# Altium PCB mini四轴.PcbDoc
Units mm, origin at the board's own origin, x right, y up, seen from the top; angles counter-clockwise.
Board outline 94.98 x 94.98 mm, 2 copper layers (Top Layer, Bottom Layer); 50 components, 42 nets, 246 pads, 0 vias.
Unrouted connection lines stored in the file: 1.
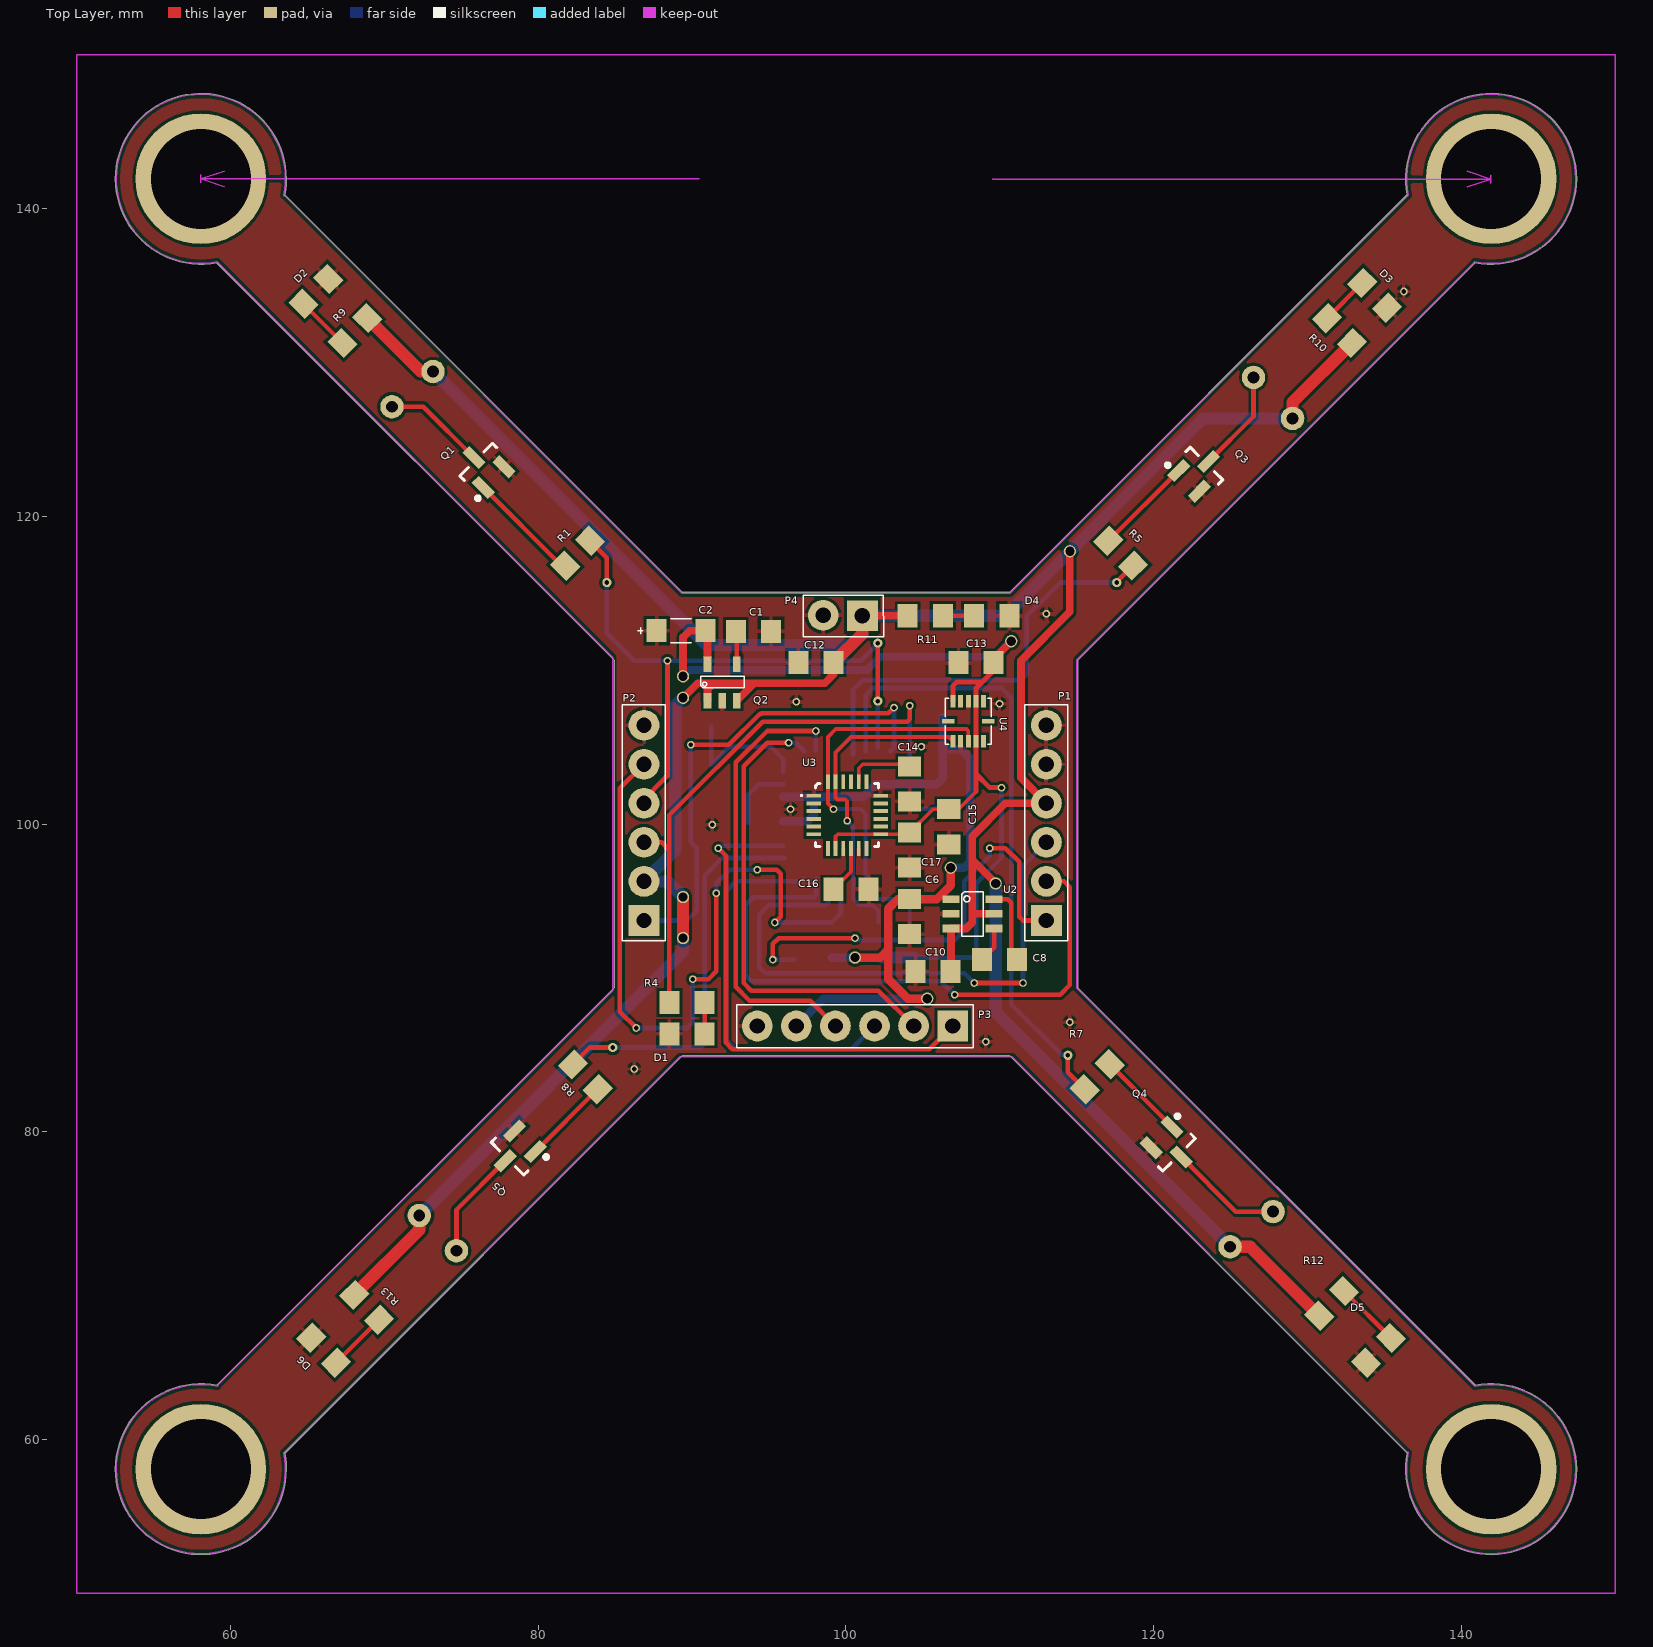
[diagram p0: Top Layer view]
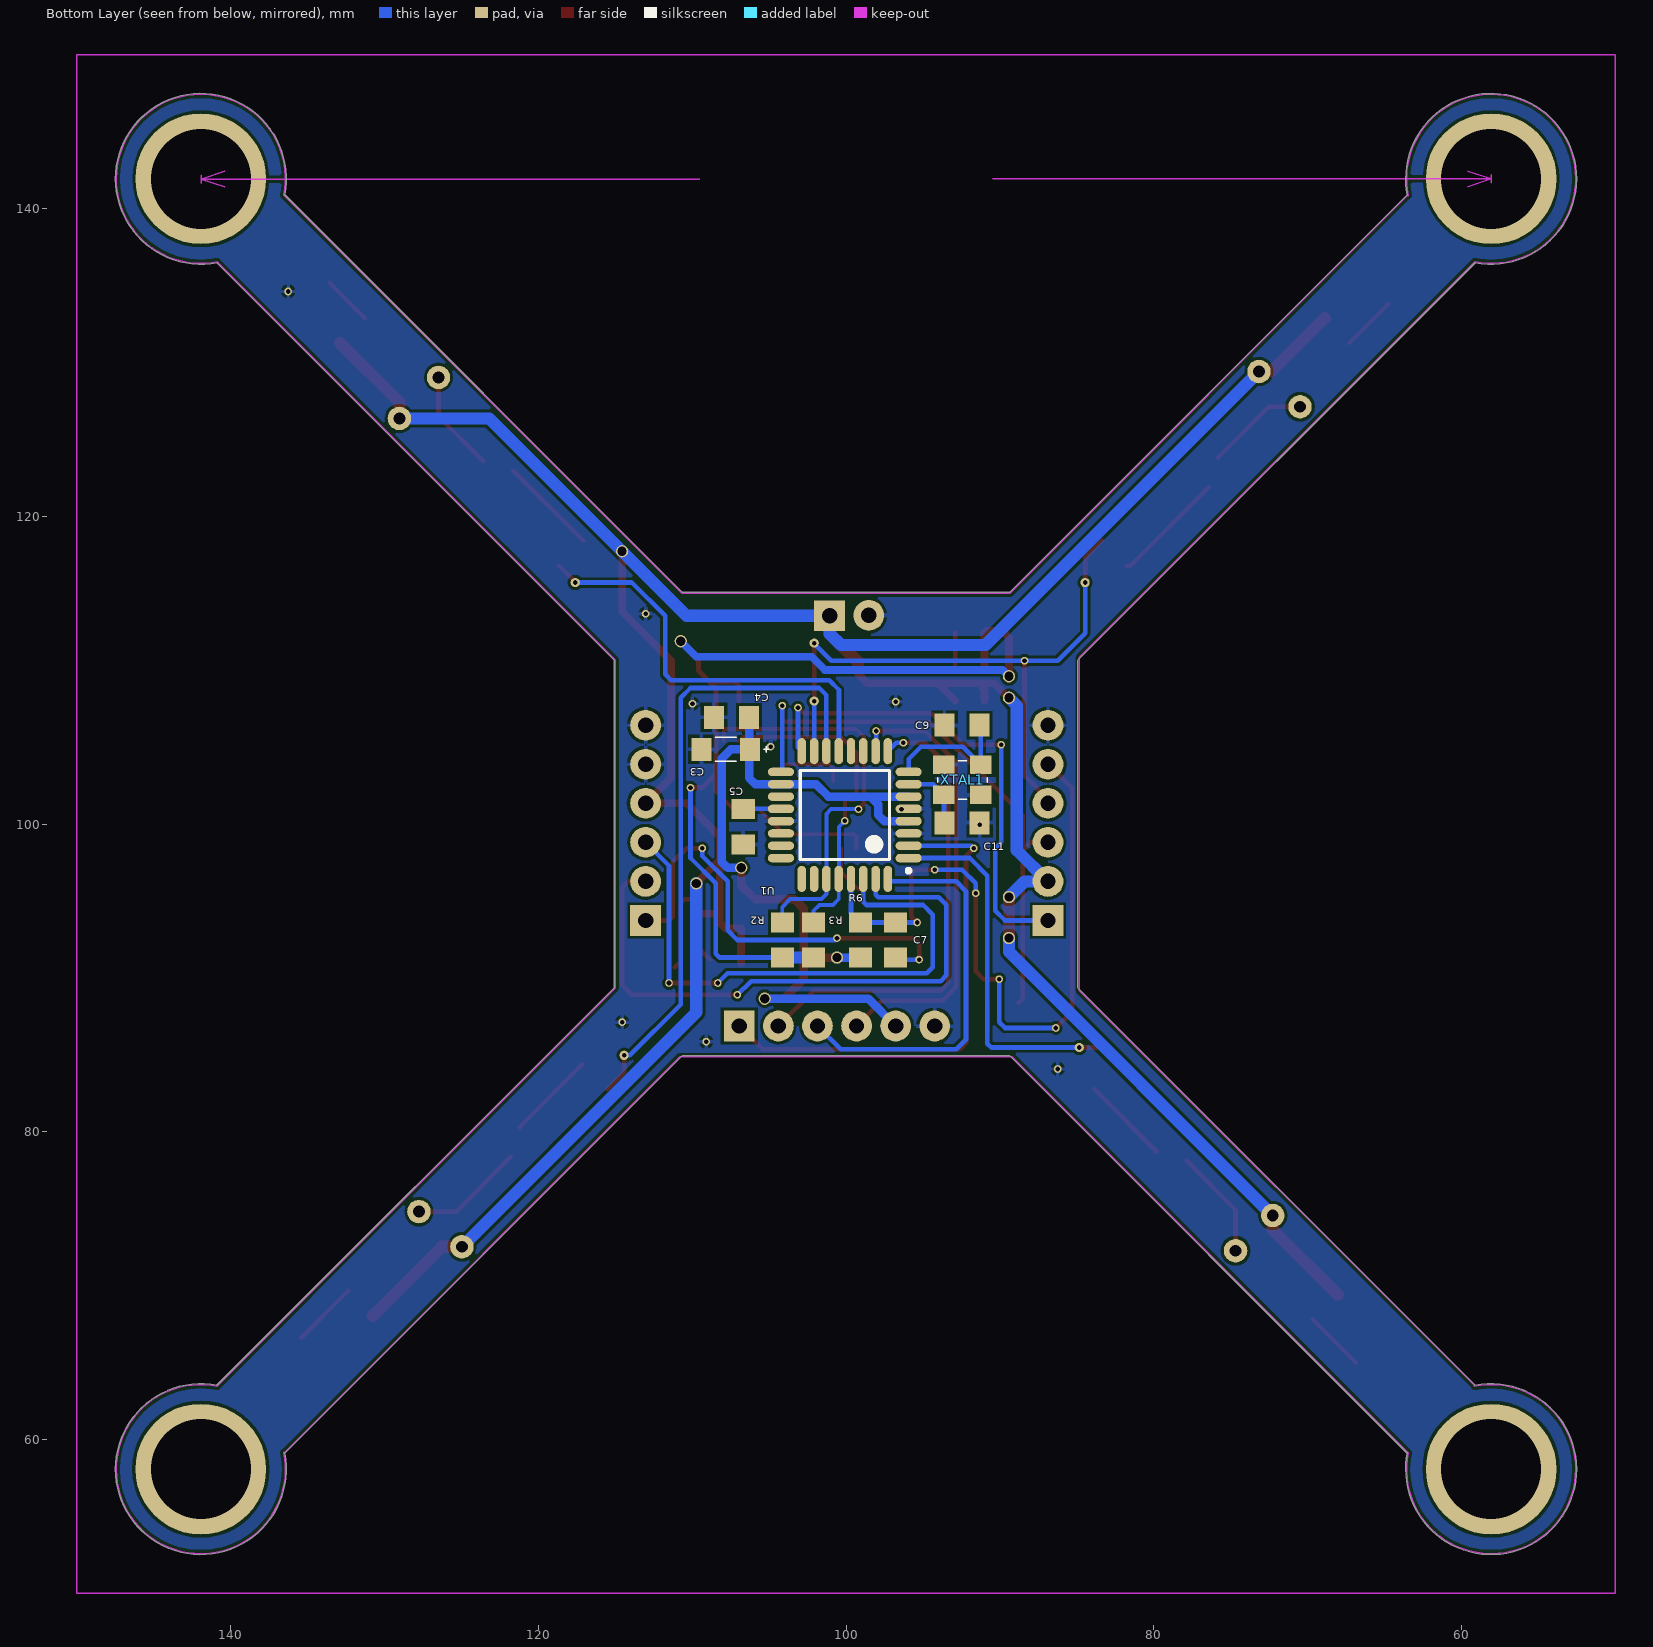
[diagram p1: Bottom Layer view, seen from below]

## Layer stack, top to bottom
Top Layer: signal copper 0.0356
Dielectric: dielectric 0.32, FR-4, Dk 4.8
Bottom Layer: signal copper 0.0356

## Board outline
63.609,58.058 ccw(c58.059,58.058) 63.511,59.096 89.365,84.95 110.634,84.95 136.473,59.11 ccw(c136.509,59.146) 136.488,59.1 ccw(c141.94,58.058) 147.49,58.058 ccw(c141.94,58.058) 140.902,63.51 115.05,89.362 115.05,110.637 140.887,136.474 ccw(c140.852,136.51) 140.898,136.49 ccw(c141.94,141.941) 147.49,141.941 ccw(c141.94,141.941) 136.487,140.903 110.635,115.05 89.364,115.05 63.526,140.889 ccw(c63.49,140.853) 63.51,140.899 ccw(c58.059,141.941) 63.609,141.941 ccw(c58.059,141.941) 59.097,136.489 84.95,110.636 84.95,89.363 59.111,63.525 ccw(c59.147,63.489) 59.101,63.51 ccw(c58.059,58.058)

## Design rules (kind name [scope] priority, off if disabled: settings)
Clearance [All] p1: gap=0.2
PolygonConnect [All] p1: connectstyle=Relief reliefconductorwidth=0.254 reliefentries=4 polygonreliefangle="90 Angle"
RoutingVias [All] p1: holewidth=0.711 width=1.27 viastyle="Through Hole" minholewidth=0.711 minwidth=1.27 maxholewidth=0.711 maxwidth=1.27
SilkscreenOverComponentPads [All] p1: minsilkscreentomaskgap=0.254
SolderMaskExpansion [All] p1: expansion=0.102
Width Width_1 [(InNet('3V3') OR InNet('5V') OR InNet('VCC'))] p1: maxlimit=0.8 minlimit=0.25 preferedwidth=0.6 minimp=50.000000 maximp=50.000000 favimp=50.000000
Width [All] p2: maxlimit=0.3 minlimit=0.25 preferedwidth=0.3 minimp=50.000000 maximp=50.000000 favimp=50.000000
27 further rules are at their usual default settings.

## Components (designator, comment, footprint, x,y, rotation, side; value= is the part's Value field where it differs from the comment)
C1 "470PF" 0805_顶层 93.98,112.522 r0 top
C2 "2.2UF" A型电容 88.9,112.522 r0 top
C3 "4.7UF" A型电容 107.442,104.902 r0 bottom
C4 "0.1UF" 0805_顶层 107.442,106.934 r0 bottom
C5 "0.1UF" 0805_顶层 106.68,99.822 r270 bottom
C6 "1UF" 0805_顶层 104.14,93.98 r270 top
C7 "0.1UF" 0805_顶层 96.774,92.456 r90 bottom
C8 "1UF" 0805_顶层 109.982,91.186 r0 top
C9 "15PF" 0805_顶层 92.456,106.426 r0 bottom
C10 "1UF" 0805_顶层 105.664,90.424 r0 top
C11 "15PF" 0805_顶层 92.456,100.076 r180 bottom
C12 "0.1UF" 0805_顶层 98.044,110.49 r0 top
C13 "22NF" 0805_顶层 108.458,110.49 r180 top
C14 "2.2NF" 0805_顶层 104.14,102.616 r270 top
C15 "0.1UF" 0805_顶层 106.68,99.822 r270 top
C16 "0.1UF" 0805_顶层 100.33,95.758 r180 top
C17 "0.1UF" 0805_顶层 104.14,98.298 r90 top
D1 "LED" 0805_顶层 89.662,86.36 r180 top
D2 "LED" 0805_顶层 65.532,134.62 r45 top
D3 "LED" 0805_顶层 134.366,134.366 r315 top
D4 "LED" 0805_顶层 109.474,113.538 r0 top
D5 "LED" 0805_顶层 134.62,65.786 r225 top
D6 "LED" 0805_顶层 66.04,65.786 r135 top
P1 "FDTI" 排针_6_2.54 113.03,93.726 r90 top
P2 "ISP" 排针_6_2.54 86.868,93.726 r90 top
P3 "RECEIVER" 排针_6_2.54 106.934,86.868 r180 top
P4 "排针_2" 排针_2 101.092,113.538 r180 top
Q1 "IRLML2502" IRLML2502_顶层 76.454,123.19 r45 top
Q2 "MIC5219_顶层" MIC5219_顶层 91.948,109.22 r180 top
Q3 "IRLML2502" IRLML2502_顶层 122.936,122.936 r315 top
Q4 "IRLML2502" IRLML2502_顶层 121.158,78.994 r225 top
Q5 "IRLML2502" IRLML2502_顶层 78.486,78.74 r135 top
R1 "20K" 0805_顶层 82.55,117.602 r225 top
R2 "2K" 0805_顶层 104.14,92.456 r90 bottom
R3 "2K" 0805_顶层 102.108,92.456 r90 bottom
R4 "680" 0805_顶层 89.662,88.392 r0 top
R5 "20K" 0805_顶层 117.856,117.602 r135 top
R6 "1K" 0805_顶层 99.06,92.456 r270 bottom
R7 "20K" 0805_顶层 116.332,83.566 r45 top
R8 "20K" 0805_顶层 83.058,83.566 r315 top
R9 "680" 0805_顶层 68.072,132.08 r45 top
R10 "680" 0805_顶层 132.08,132.08 r315 top
R11 "680" 0805_顶层 105.156,113.538 r180 top
R12 "680" 0805_顶层 131.572,68.834 r225 top
R13 "680" 0805_顶层 68.834,68.58 r135 top
U1 "Atmega32_顶层" Atmega32_顶层 100.076,100.584 r0 bottom
U2 "LTC3200_顶层" LTC3200_顶层 108.204,94.234 r0 top
U3 "ITG3205_顶层" ITG3205_顶层 100.076,100.584 r0 top
U4 "BMA020_顶层" BMA020_顶层 107.95,106.68 r180 top
XTAL1 "晶振" 晶振_3225_顶层 92.456,102.87 r180 bottom

## Footprints (in the part's own frame and the unit in brackets; to place one, negate y for a bottom-side part, rotate by r counter-clockwise, add the part's x,y. Pads: shape width x height; smd on the part's side, far side on the other; paste and mask are expansions set on the pad)
0805_顶层 [mm]
  rect 1.3x1.5 smd: 1(-1.138,0) 2(1.143,0)
Atmega32_顶层 [mm]
  oval 1.7x0.55 smd: 1(-4.15,2.8) 2(-4.15,2) 3(-4.15,1.2) 4(-4.15,0.4) 5(-4.15,-0.4) 6(-4.15,-1.2) 7(-4.15,-2) 8(-4.15,-2.8) 17(4.15,-2.8) 18(4.15,-2) 19(4.15,-1.2) 20(4.15,-0.4) 21(4.15,0.4) 22(4.15,1.2) 23(4.15,2) 24(4.15,2.8)
  oval 0.55x1.7 smd: 9(-2.8,-4.15) 10(-2,-4.15) 11(-1.2,-4.15) 12(-0.4,-4.15) 13(0.4,-4.15) 14(1.2,-4.15) 15(2,-4.15) 16(2.8,-4.15) 25(2.8,4.15) 26(2,4.15) 27(1.2,4.15) 28(0.4,4.15) 29(-0.4,4.15) 30(-1.2,4.15) 31(-2,4.15) 32(-2.8,4.15)
  silkscreen extent -4.27,-2.9 2.9,3.75, body extent -3.5,-3.5 3.5,3.5, height 1.2
A型电容 [mm]
  rect 1.3x1.5 smd: 1(-1.213,0.05) 2(1.968,0.05)
  silkscreen extent -2.42,-0.73 1.05,0.82
BMA020_顶层 [mm]
  rect 0.32x0.8 smd mask+0.04: 1(-1,-1.3) 2(-0.5,-1.3) 3(0,-1.3) 4(0.5,-1.3) 5(1,-1.3) 6(1,1.3) 7(0.5,1.3) 8(0,1.3) 9(-0.5,1.3) 10(-1,1.3)
  rect 0.8x0.32 smd paste+0 mask+0.04: 11(-1.3,0)
  rect 0.8x0.32 smd mask+0.04: 12(1.3,0)
  silkscreen extent -1.5,-1.5 1.5,1.5
IRLML2502_顶层 [mm]
  rect 0.65x1.5 smd: 1(-0.95,-0.9) 2(0.95,-0.9) 3(0,0.9)
  silkscreen extent -1.82,-1.27 1.5,0.7, body extent -1.53,-0.7 1.52,0.7, height 1.1
ITG3205_顶层 [mm]
  rect 0.95x0.25 smd: 1(-2.175,1.25) 2(-2.175,0.75) 3(-2.175,0.25) 4(-2.175,-0.25) 5(-2.175,-0.75) 6(-2.175,-1.25) 13(2.175,-1.25) 14(2.175,-0.75) 15(2.175,-0.25) 16(2.175,0.25) 17(2.175,0.75) 18(2.175,1.25)
  rect 0.25x0.95 smd: 7(-1.25,-2.175) 8(-0.75,-2.175) 9(-0.25,-2.175) 10(0.25,-2.175) 11(0.75,-2.175) 12(1.25,-2.175) 19(1.25,2.175) 20(0.75,2.175) 21(0.25,2.175) 22(-0.25,2.175) 23(-0.75,2.175) 24(-1.25,2.175)
  silkscreen extent -3.02,-2.05 2.05,2.05, body extent -2,-2 2,2, height 0.85
LTC3200_顶层 [mm]
  rect 1.1x0.5 smd: 1(-1.375,0.875) 2(-1.375,-0.075) 3(-1.375,-1.025) 4(1.425,-1.025) 5(1.425,-0.075) 6(1.425,0.875)
  silkscreen extent -0.67,-1.53 0.73,1.38
MIC5219_顶层 [mm]
  rect 0.5x1 smd: 1(0.95,1.2) 2(0,1.2) 3(-0.95,1.2) 4(-0.95,-1.175) 5(0.95,-1.175)
  silkscreen extent -1.42,-0.38 1.4,0.38
排针_2 [mm]
  rect 2x2 hole 1: 1(0.025,0)
  round 2 hole 1: 2(2.575,-0.025)
  silkscreen extent -1.37,-1.33 3.87,1.35
排针_6_2.54 [mm]
  rect 2x2 hole 1: 1(0,0)
  round 2 hole 1: 2(2.54,0) 3(5.08,0) 4(7.62,0) 5(10.16,0) 6(12.7,0)
  silkscreen extent -1.33,-1.38 14.03,1.4
晶振_3225_顶层 [mm]
  rect 1.4x1.2 smd: 1(-1.175,-0.975) 2(1.225,-0.975) 3(1.225,0.975) 4(-1.175,0.975)
  silkscreen extent -1.58,-1.25 1.62,1.25

## Part data
C1 C4 C5 C6 C7 C8 C9 C10 C11 C12 C13 C14 C15 C16 C17: library part 电容_无极性_0805_顶层, "电容"
C2 C3: library part 电容_A型, "电容_A型"
D1 D2 D3 D4 D5 D6: library part LED_0805_顶层
P1 P2 P3: library part 排针_6_2.54, "排针_6_2.54"
Q1 Q3 Q4 Q5: library part IRLML2502_顶层
Q2: "MIC5219"
R1 R2 R3 R4 R5 R6 R7 R8 R9 R10 R11 R12 R13: library part 电阻_0805_顶层, "电阻"
U1: "Atmega32"
U2: "LTC3200"
U3: "ITG3205"
U4: "BMA020"
XTAL1: library part 晶振_3225_顶层

## Free pads (board coordinates)
  round 1.524 hole 0.762: 0(73.152,129.413) 0(74.676,72.263) 0(124.968,72.517) 0(126.492,129.032) 1(70.485,127.127) 1(72.263,74.549) 1(127.762,74.803) 1(129.032,126.365)
  round 0.6 hole 0.3: 0(84.455,115.697) 0(84.836,85.471) 0(102.066,107.992) 0(102.066,111.76) 0(114.427,84.963) 0(117.602,115.697)
  round 0.5 hole 0.3: 0(86.233,84.074) 0(86.36,86.741) 0(88.392,110.617) 0(89.916,105.156) 0(90.043,89.916) 0(91.313,99.949) 0(91.567,95.504) 0(91.694,98.425) 0(94.234,97.028) 0(95.25,91.186) 0(95.377,93.599) 0(96.266,105.283) 0(96.393,100.965) 0(96.774,107.95) 0(98.044,106.045) 0(99.187,100.965) 0(100.076,100.203) 0(100.584,92.583) 0(103.124,107.569) 0(104.14,107.696) 0(104.902,105.029) 0(107.061,88.9) 0(108.331,89.662) 0(109.093,85.852) 0(109.347,98.425) 0(109.982,107.823) 0(110.109,102.362) 0(111.506,89.662) 0(113.03,113.665) 0(114.554,87.122) 0(136.271,134.62)
  round 0.8 hole 0.6: 8(89.408,92.583) 8(89.408,95.25) 8(89.408,108.204) 8(89.408,109.601) 8(100.584,91.313) 8(105.283,88.646) 8(106.807,97.155) 8(109.728,96.139) 8(110.744,111.887) 8(114.554,117.729)
  round 8.5 hole 6.5: 9(58.059,141.941) 10(58.059,58.058) 11(141.942,58.058) 12(141.943,141.943)

## Nets (pads, with @x,y where several pads share a name; then routed paths per layer and width w, separated by ;. In a path a pad name is that pad's centre, name@x,y a point inside that pad or via, vN(x,y) a via of type N, cw(c..) or ccw(c..) an arc to the next point about the centre after c; other vN are vias at no path point)
3V3: C2.2 C13.1 C15.1 C17.2 pad.0@110.109,102.362 pad.8@89.408,109.601 pad.8@110.744,111.887 Q2.5 R2.1 R3.1 U3.8 U3.13 U4.2 U4.5 U4.9 | length 73.4
  Top Layer w0.25: U3.8 99.326,99.199 99.461,99.334 U3.13 104.033,99.334 C17.2 105.659,100.96 C15.1 107.31,100.96 108.45,102.1
  Top Layer w0.32: U4.5 106.95,108.982 107.188,109.22 108.839,109.22 ; 108.45,102.1 108.45,103.251 ; C13.1 109.596,109.977 108.839,109.22 ; pad.0@110.109,102.362 109.339,102.362 108.45,103.251 ; 108.45,103.251 U4.9 U4.2 108.45,108.831 108.839,109.22
  Top Layer w0.5: pad.8@89.408,109.601 89.408,112.141 89.839,112.572 C2.2 90.998,112.442 Q2.5 ; C13.1@109.596,110.739 pad.8@110.744,111.887
  Bottom Layer w0.3: R2.1 108.209,91.318 108.463,91.572 108.463,96.144 110.109,97.79 pad.0@110.109,102.362
  Bottom Layer w0.5: pad.8@89.535,109.728 89.408,109.601 89.824,110.017 101.381,110.017 102.235,110.871 109.728,110.871 pad.8@110.744,111.887
  Bottom Layer w0.8: R3.1@102.362,91.318 R2.1 R2.1@104.394,91.318
5V: C3.1 C4.1 C6.1 P3.5 pad.8@100.584,91.313 pad.8@105.283,88.646 pad.8@106.807,97.155 R6.2 U1.4 U1.6 U1.18 U2.1 | length 55.2
  Top Layer w0.55: pad.8@100.584,91.313 102.235,91.313 102.743,91.821 ; pad.8@105.283,88.646 104.013,88.646 102.743,89.916 102.743,91.821 ; pad.8@106.807,97.155 106.807,96.012 105.913,95.118 104.394,95.118 103.373,95.118 102.743,94.488 102.743,91.821
  Bottom Layer w0.55: U1.4 97.517,100.184 97.917,100.584 97.917,101.276 98.425,101.784 ; U1.6 98.425,101.784 ; P3.5 98.552,88.646 pad.8@105.283,88.646 ; R6.2 pad.8@100.584,91.313 ; C3.1 C3.1@106.304,104.852 ; C4.1 C3.1@106.304,104.852 ; pad.8@106.807,97.155 107.696,97.155 108.077,97.536 108.077,104.267 107.492,104.852 C3.1@106.304,104.852 ; 98.425,101.784 101.149,101.784 101.949,102.584 U1.18 105.886,102.584 106.304,103.002 C3.1@106.304,104.852
D2: P3.3 U1.32 | length 25.6
  Bottom Layer w0.3: U1.32 97.108,96.266 92.837,96.266 92.202,95.631 92.202,85.979 92.837,85.344 100.33,85.344 P3.3
D3: pad.0@84.836,85.471 R8.1 U1.1 | length 25.7
  Top Layer w0.3: R8.1 83.354,85.471 pad.0@84.836,85.471
  Bottom Layer w0.3: pad.0@84.836,85.471 90.551,85.471 90.805,85.725 90.805,96.647 91.948,97.79 U1.1@96.012,97.79
D4: P3.1 pad.0@91.694,98.425 U1.2 | length 32.6
  Top Layer w0.3: pad.0@91.694,98.425 92.202,97.917 92.202,85.781 92.583,85.4 ; 92.639,85.344 105.41,85.344 P3.1
  Bottom Layer w0.3: pad.0@91.694,98.425 91.853,98.584 U1.2
D5: P3.2 pad.0@96.266,105.283 U1.9 | length 31.1
  Top Layer w0.3: pad.0@96.266,105.283 94.869,105.283 93.345,103.759 93.345,89.662 93.853,89.154 102.108,89.154 P3.2
  Bottom Layer w0.3: pad.0@96.266,105.283 96.727,105.283 U1.9
D6: P3.4 pad.0@98.044,106.045 U1.10 | length 29.5
  Top Layer w0.3: pad.0@98.044,106.045 94.869,106.045 92.837,104.013 92.837,89.408 93.726,88.519 97.663,88.519 P3.4
  Bottom Layer w0.3: U1.10@98.044,104.766 pad.0@98.044,106.045
D9: pad.0@117.602,115.697 R5.1 U1.13 | length 28
  Top Layer w0.3: pad.0@117.602,115.697 117.602,115.739 R5.1
  Bottom Layer w0.3: U1.13@100.457,104.521 100.457,108.712 101.092,109.347 111.379,109.347 111.76,109.728 111.76,113.538 113.919,115.697 pad.0@117.602,115.697
D10: pad.0@114.427,84.963 R7.1 U1.14 | length 41.2
  Top Layer w0.3: pad.0@114.427,84.963 114.427,83.862 R7.1
  Bottom Layer w0.3: U1.14 101.276,108.388 101.727,108.839 110.109,108.839 110.744,108.204 110.744,88.265 114.046,84.963 pad.0@114.427,84.963
D11: P2.4 pad.0@84.455,115.697 pad.0@88.392,110.617 pad.0@102.066,107.992 pad.0@102.066,111.76 R1.1 U1.15 | length 42.1
  Top Layer w0.3: R1.1 84.455,117.306 pad.0@84.455,115.697 ; P2.4@86.614,101.346 88.392,103.124 88.392,110.363 pad.0@88.392,110.617 ; pad.0@102.066,107.992 pad.0@102.066,111.76
  Bottom Layer w0.3: pad.0@84.455,115.697 84.455,112.395 86.233,110.617 100.965,110.617 pad.0@102.087,111.739 ; U1.15@102.066,104.944 pad.0@102.066,107.992
D12: P2.1 pad.0@89.916,105.156 pad.0@103.124,107.569 U1.16 | length 32.3
  Top Layer w0.3: pad.0@89.916,105.156 92.384,105.156 94.375,107.147 94.447,107.147 94.488,107.188 102.743,107.188 pad.0@103.124,107.569
  Bottom Layer w0.3: P2.1 89.662,93.726 90.297,94.361 90.297,98.425 89.916,98.806 89.916,102.108 ; 89.916,102.616 89.916,102.108 ; pad.0@89.916,105.156 89.916,102.108 ; U1.16 103.124,104.982 pad.0@103.124,107.569
D13: P2.3 pad.0@104.14,107.696 R4.1 U1.17 | length 37.7
  Top Layer w0.3: P2.3@86.614,98.806 P2.3 88.011,98.806 88.519,98.298 ; R4.1@88.778,88.392 88.519,88.651 88.519,98.298 ; pad.0@104.14,107.696 104.14,106.807 103.98,106.647 94.582,106.647 88.519,100.584 88.519,98.298
  Bottom Layer w0.3: U1.17@104.14,103.47 pad.0@104.14,107.696
DTR: C7.1 P1.1 pad.0@95.25,91.186 pad.0@100.584,92.583 pad.0@109.347,98.425 | length 29.1
  Top Layer w0.3: pad.0@95.25,91.186 95.25,92.202 95.631,92.583 pad.0@100.584,92.583 ; pad.0@109.347,98.425 110.363,98.425 111.252,97.536 111.252,93.98 111.506,93.726 P1.1
  Bottom Layer w0.3: pad.0@95.25,91.186 C7.1@96.642,91.186 ; pad.0@100.584,92.583 100.711,92.456 107.061,92.456 107.696,93.091 107.696,96.266 109.347,97.917 pad.0@109.347,98.425
GND: C1.2 C2.1 C3.2 C4.2 C5.2 C6.2 C9.2 C10.1 C11.2 C12.1 C13.2 C14.2 C15.2 C16.1 C17.1 D1.2 D2.2 D3.2 D4.2 D5.2 D6.2 P1.5 P1.6 P2.6 P3.6 P4.2 pad.0@86.233,84.074 pad.0@91.313,99.949 pad.0@96.393,100.965 pad.0@96.774,107.95 pad.0@104.902,105.029 pad.0@109.093,85.852 pad.0@109.982,107.823 pad.0@113.03,113.665 pad.0@114.554,87.122 pad.0@136.271,134.62 Q1.2 Q2.2 Q3.2 Q4.2 Q5.2 U1.3 U1.5 U1.21 U2.2 U3.1 U3.9 U3.11 U3.18 U4.3 U4.7 XTAL1.2 XTAL1.4
M1-: pad.0@74.676,72.263 Q5.3 | length 7.2
  Top Layer w0.3: pad.0@74.676,72.263 74.676,74.93 Q5.3
M2-: pad.1@127.762,74.803 Q4.3 | length 7.4
  Top Layer w0.3: Q4.3 125.349,74.803 pad.1@127.762,74.803
M3-: pad.0@126.492,129.032 Q3.3 | length 6.7
  Top Layer w0.3: Q3.3 126.492,126.492 pad.0@126.492,129.032
M4-: pad.1@70.485,127.127 Q1.3 | length 6.7
  Top Layer w0.3: pad.1@70.485,127.127 72.517,127.127 Q1.3
NetC1_1: C1.1 Q2.4 | length 2.1
  Top Layer w0.3: Q2.4 C1.1@92.898,112.466
NetC5_1: C5.1 U1.20 | length 2.4
  Bottom Layer w0.3: U1.20 C5.1@106.656,100.984
NetC8_1: C8.1 U2.4 | length 2.3
  Top Layer w0.3: C8.1 109.629,91.971 U2.4
NetC8_2: C8.2 U2.6 | length 5.6
  Top Layer w0.3: U2.6 110.504,95.109 110.744,94.869 110.744,91.059 C8.2@111.125,90.678
NetC9_1: C9.1 U1.8 XTAL1.3 | length 9
  Bottom Layer w0.3: C9.1@91.231,106.339 XTAL1.3 ; XTAL1.3@91.318,103.932 XTAL1.3 ; U1.8 95.926,104.226 95.123,105.029 92.415,105.029 XTAL1.3
NetC11_1: C11.1 U1.7 XTAL1.1 | length 4.4
  Bottom Layer w0.3: C11.1 93.631,100.113 XTAL1.1 94.32,102.584 U1.7
NetC14_1: C14.1 U3.20 | length 4.3
  Top Layer w0.25: U3.20 100.826,103.62 101.092,103.886 104.008,103.886 C14.1
NetC16_2: C16.2 U3.10 | length 3.1
  Top Layer w0.25: C16.2 100.326,96.897 U3.10
NetD1_1: D1.1 R4.2 | length 2
  Top Layer w0.3: D1.1@90.805,86.365 R4.2
NetD2_1: D2.1 R9.1 | length 3.6
  Top Layer w0.254: D2.1 R9.1
NetD3_1: D3.1 R10.1 | length 3.2
  Top Layer w0.3: R10.1 D3.1
NetD4_1: D4.1 R11.1 | length 2
  Top Layer w0.3: R11.1 D4.1
NetD5_1: D5.1 R12.1 | length 4.3
  Top Layer w0.3: R12.1 D5.1
NetD6_1: D6.1 R13.1 | length 4
  Top Layer w0.3: D6.1 R13.1
NetQ1_1: Q1.1 R1.2 | length 7.4
  Top Layer w0.3: Q1.1 81.507,116.794 R1.2
NetQ3_1: Q3.1 R5.2 | length 6.5
  Top Layer w0.3: R5.2@117.067,118.41 Q3.1
NetQ4_1: Q4.1 R7.2 | length 5.8
  Top Layer w0.3: R7.2 121.193,80.321 Q4.1
NetQ5_1: Q5.1 R8.2 | length 5.7
  Top Layer w0.3: Q5.1 R8.2@83.847,82.758
RESET: C7.2 P2.5 pad.0@86.36,86.741 pad.0@90.043,89.916 pad.0@91.567,95.504 pad.0@94.234,97.028 pad.0@95.377,93.599 R6.1 U1.29 | length 47.1
  Top Layer w0.3: pad.0@86.36,86.741 85.3,87.801 85.3,102.318 P2.5 ; pad.0@90.043,89.916 91.059,89.916 91.567,90.424 pad.0@91.567,95.504 ; pad.0@94.234,97.028 95.504,97.028 95.758,96.774 95.758,93.98 pad.0@95.377,93.599
  Bottom Layer w0.3: pad.0@86.36,86.741 89.662,86.741 90.043,87.122 pad.0@90.043,89.916 ; pad.0@91.567,95.504 91.567,96.139 92.456,97.028 pad.0@94.234,97.028 ; pad.0@95.377,93.599 C7.2 R6.1@99.055,93.599 ; R6.1 99.676,94.21 U1.29
RX: P1.3 pad.0@108.331,89.662 pad.0@111.506,89.662 U1.30 | length 37.1
  Top Layer w0.3: pad.0@108.331,89.662 pad.0@111.506,89.662
  Bottom Layer w0.3: U1.30 98.876,94.939 98.671,94.734 94.988,94.734 94.361,94.107 94.361,90.678 94.75,90.289 107.704,90.289 pad.0@108.331,89.662 ; pad.0@111.506,89.662 111.506,97.282 P1.3
SCL: pad.0@100.076,100.203 R3.2 U1.28 U3.23 U4.6 | length 21.2
  Top Layer w0.25: pad.0@100.076,100.203 100.076,101.473 99.949,101.6 99.441,101.6 99.326,101.715 U3.23 99.326,104.66 100.33,105.664 106.666,105.664 U4.6
  Bottom Layer w0.25: pad.0@100.076,100.203 100.457,99.822 U1.28@100.457,96.393 ; U1.28 100.476,95.104 100.838,94.742 101.727,94.742 102.108,94.361 R3.2
SDA: pad.0@99.187,100.965 R2.2 U1.27 U3.24 U4.8 | length 26.6
  Top Layer w0.25: pad.0@99.187,100.965 98.826,101.326 U3.24 98.826,105.664 99.334,106.172 107.823,106.172 107.95,106.045 U4.8
  Bottom Layer w0.25: pad.0@99.187,100.965 100.965,100.965 101.276,100.654 U1.27 101.276,95.447 101.6,95.123 103.632,95.123 104.14,94.615 R2.2
TX: P1.2 pad.0@107.061,88.9 U1.31 | length 40.4
  Top Layer w0.3: pad.0@107.061,88.9 113.919,88.9 114.554,89.535 114.554,95.885 114.173,96.266 P1.2
  Bottom Layer w0.3: U1.31 98.076,95.409 97.901,95.234 93.964,95.234 93.472,94.742 93.472,90.17 93.853,89.789 106.172,89.789 pad.0@107.061,88.9
VCC: C10.2 C12.2 P1.4 P2.2 P4.1 pad.0@73.152,129.413 pad.0@124.968,72.517 pad.1@72.263,74.549 pad.1@129.032,126.365 pad.8@89.408,92.583 pad.8@89.408,95.25 pad.8@89.408,108.204 pad.8@109.728,96.139 pad.8@114.554,117.729 Q2.1 Q2.3 R9.2 R10.2 R11.2 R12.2 R13.2 U2.3 U2.5 | length 228.2
  Top Layer w0.5: pad.8@89.408,108.204 90.363,109.159 91.379,109.159 ; Q2.1 90.998,108.778 91.379,109.159 ; Q2.3 94.037,109.159 91.379,109.159 ; 94.107,109.159 98.618,109.159 99.187,109.728 C12.2 ; P4.1 R11.2 ; C10.2@106.829,90.954 U2.3 107.814,93.209 108.204,93.599 108.204,97.663 ; 108.383,94.159 U2.5 ; pad.8@109.728,96.139 108.204,97.663 ; pad.8@114.554,117.729 114.554,113.792 111.379,110.617 111.379,102.997 P1.4 110.363,101.346 108.204,99.187 108.204,97.663
  Top Layer w0.8: R13.2 72.263,73.625 pad.1@72.263,74.549 ; R9.2 72.355,129.413 pad.0@73.152,129.413 ; pad.8@89.408,92.583 pad.8@89.408,95.25 ; C12.2 101.067,112.37 P4.1 ; pad.0@124.968,72.517 126.273,72.517 R12.2 ; pad.1@129.032,126.365 129.032,127.416 R10.2
  Bottom Layer w0.8: pad.1@72.263,74.549 89.408,91.694 pad.8@89.408,92.583 ; pad.0@73.152,129.413 90.932,111.633 100.33,111.633 101.067,112.37 P4.1 110.363,113.538 123.19,126.365 pad.1@129.032,126.365 ; pad.8@89.408,95.25 88.392,96.266 P2.2 88.9,98.298 88.9,107.696 pad.8@89.408,108.204 ; pad.8@109.728,96.139 109.728,87.757 pad.0@124.968,72.517
pads on no net: U1.11 U1.12 U1.19 U1.22 U1.23 U1.24 U1.25 U1.26 U3.2 U3.3 U3.4 U3.5 U3.6 U3.7 U3.12 U3.14 U3.15 U3.16 U3.17 U3.19 U3.21 U3.22 U4.1 U4.4 U4.10 U4.11 U4.12

## Polygon pours and split planes (outlines as drawn)
GND on Top Layer "Bottom Layer-No Net" (solid, remove dead copper): 50.673,149.098 50.927,148.844 149.098,148.844 149.098,52.07 148.463,51.435 147.955,50.927 51.054,50.927
GND on Bottom Layer "Bottom Layer-No Net" (solid, remove dead copper): 51.054,149.098 148.59,149.098 149.225,148.463 149.479,148.209 149.479,51.816 52.324,51.816 51.308,52.832

## Keep-outs
Keep-Out Layer:
  lines w0.1: 58.059,141.687 58.059,142.195 ; 59.094,136.564 84.836,110.821 84.836,89.178 59.147,63.489 ; 59.098,136.54 cw(c58.059,141.941) 63.45,140.853 ; 59.147,63.449 ccw(c58.059,58.058) 63.46,59.097 ; 59.583,141.433 58.059,141.941 ; 59.583,142.449 58.059,141.941 ; 63.436,59.093 89.212,84.868 110.787,84.868 136.509,59.146 ; 63.49,140.853 89.343,115 110.656,115 136.562,140.906 ; 90.444,141.935 58.059,141.941 ; 109.539,141.931 141.924,141.924 ; 114.999,89.342 140.905,63.436 ; 114.999,110.657 140.872,136.53 ; 115,89.342 115,110.657 ; 136.539,140.902 cw(c141.94,141.941) 140.852,136.55 ; 136.549,59.146 ccw(c141.94,58.058) 140.901,63.459 ; 140.4,141.417 141.924,141.924 ; 140.4,142.433 141.924,141.924 ; 141.924,141.67 141.924,142.178 ; 50,50 150,50 150,150 50,150 50,50
  text "83.86526 (mm)" at 90.698,141.02 h1.52 r359.99